# Altium PCB WiirdFlex Top Alignment.PcbDoc
Units mm, origin at the board's own origin, x right, y up, seen from the top; angles counter-clockwise.
Board outline 77.75 x 78.75 mm, 2 copper layers (Top Layer, Bottom Layer); 6 components, 1 nets, 135 pads, 0 vias.
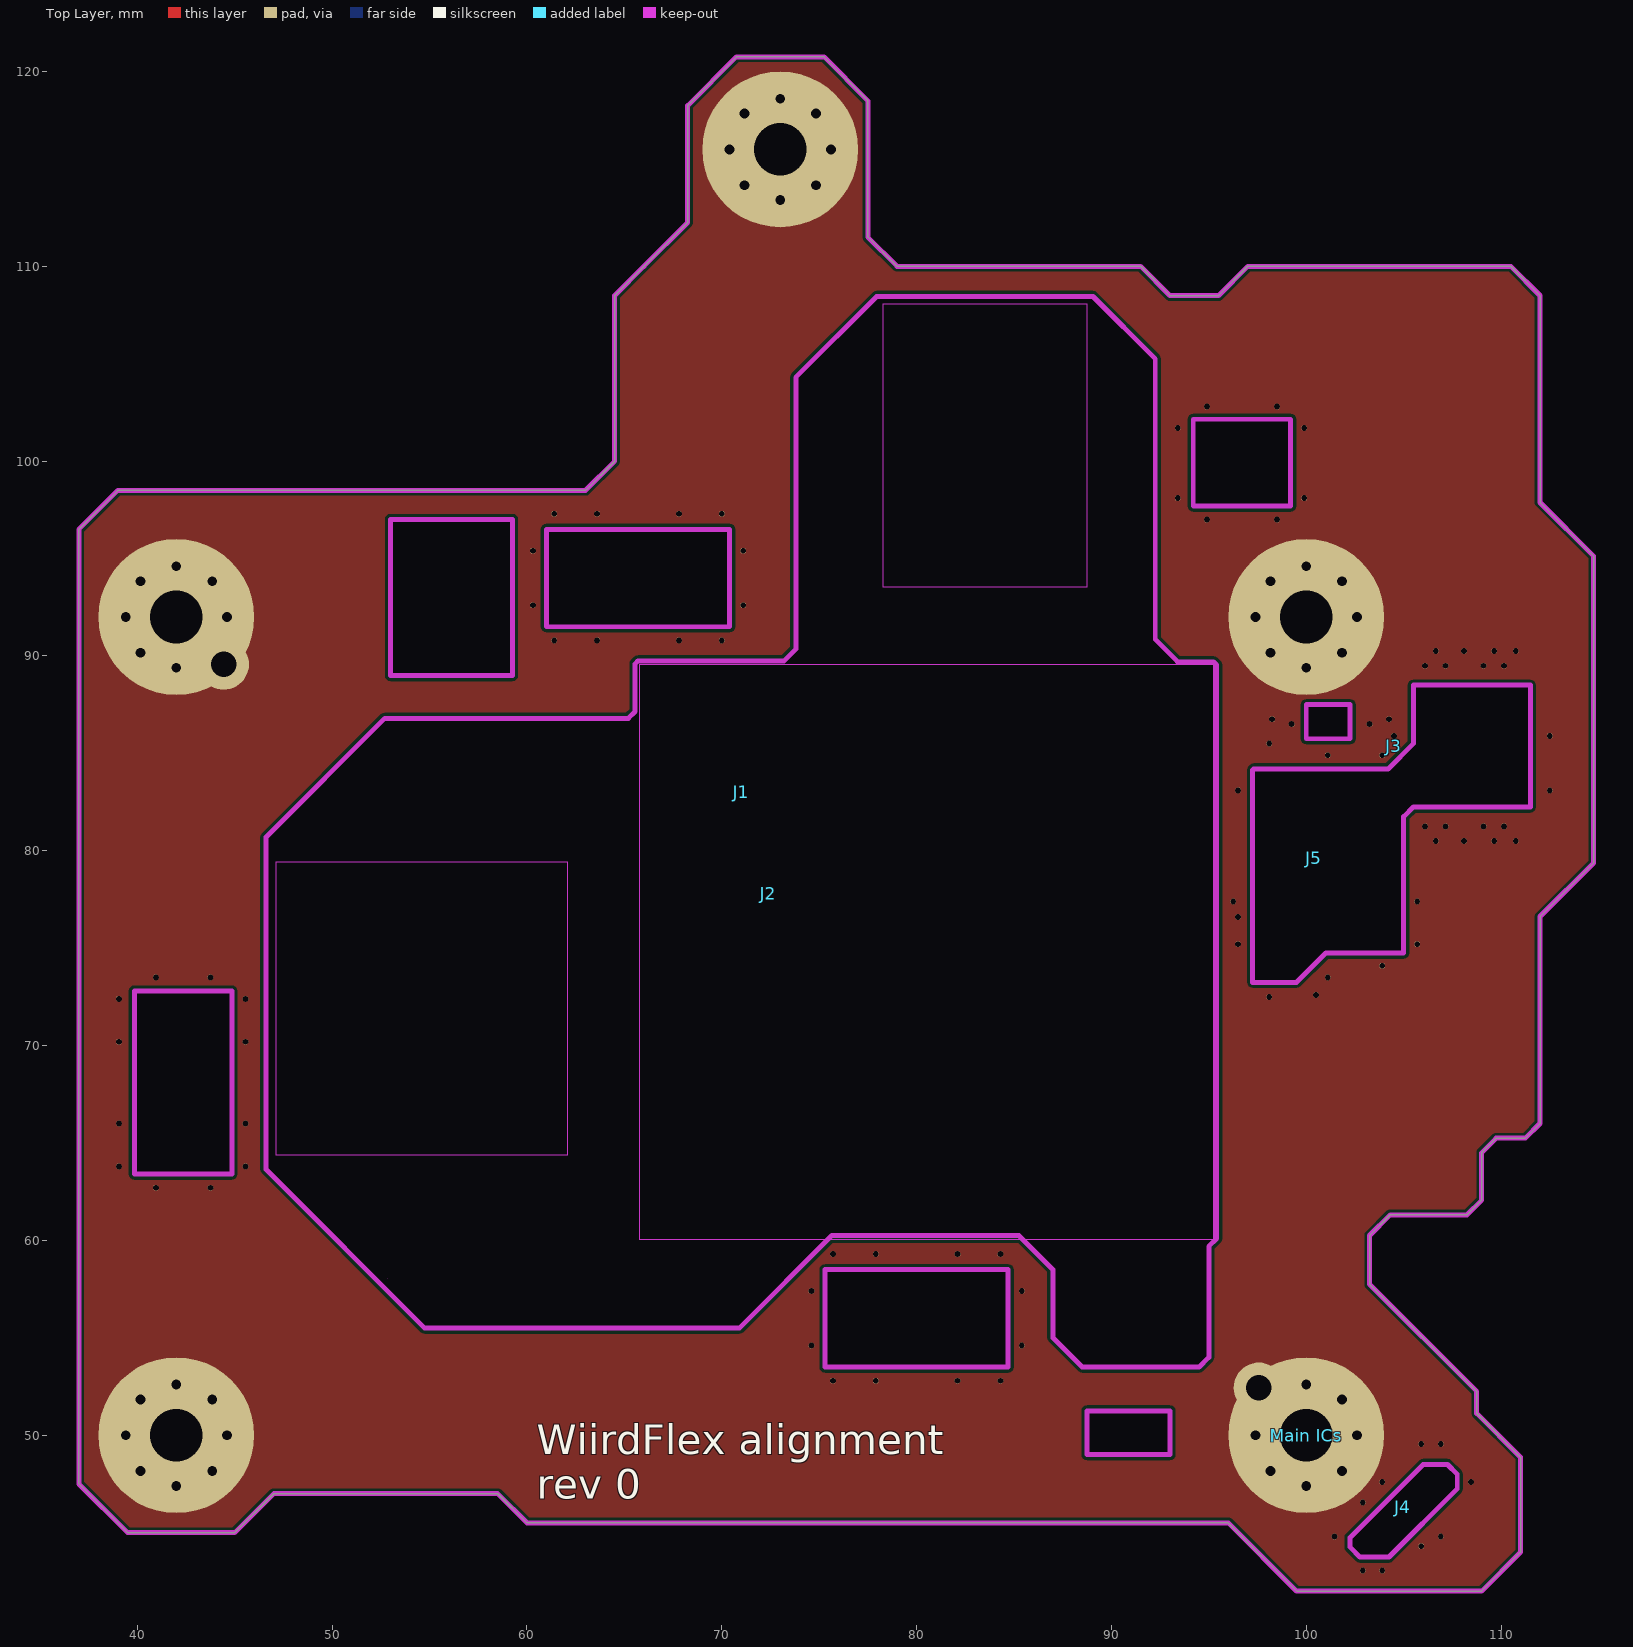
[diagram p0: Top Layer view]
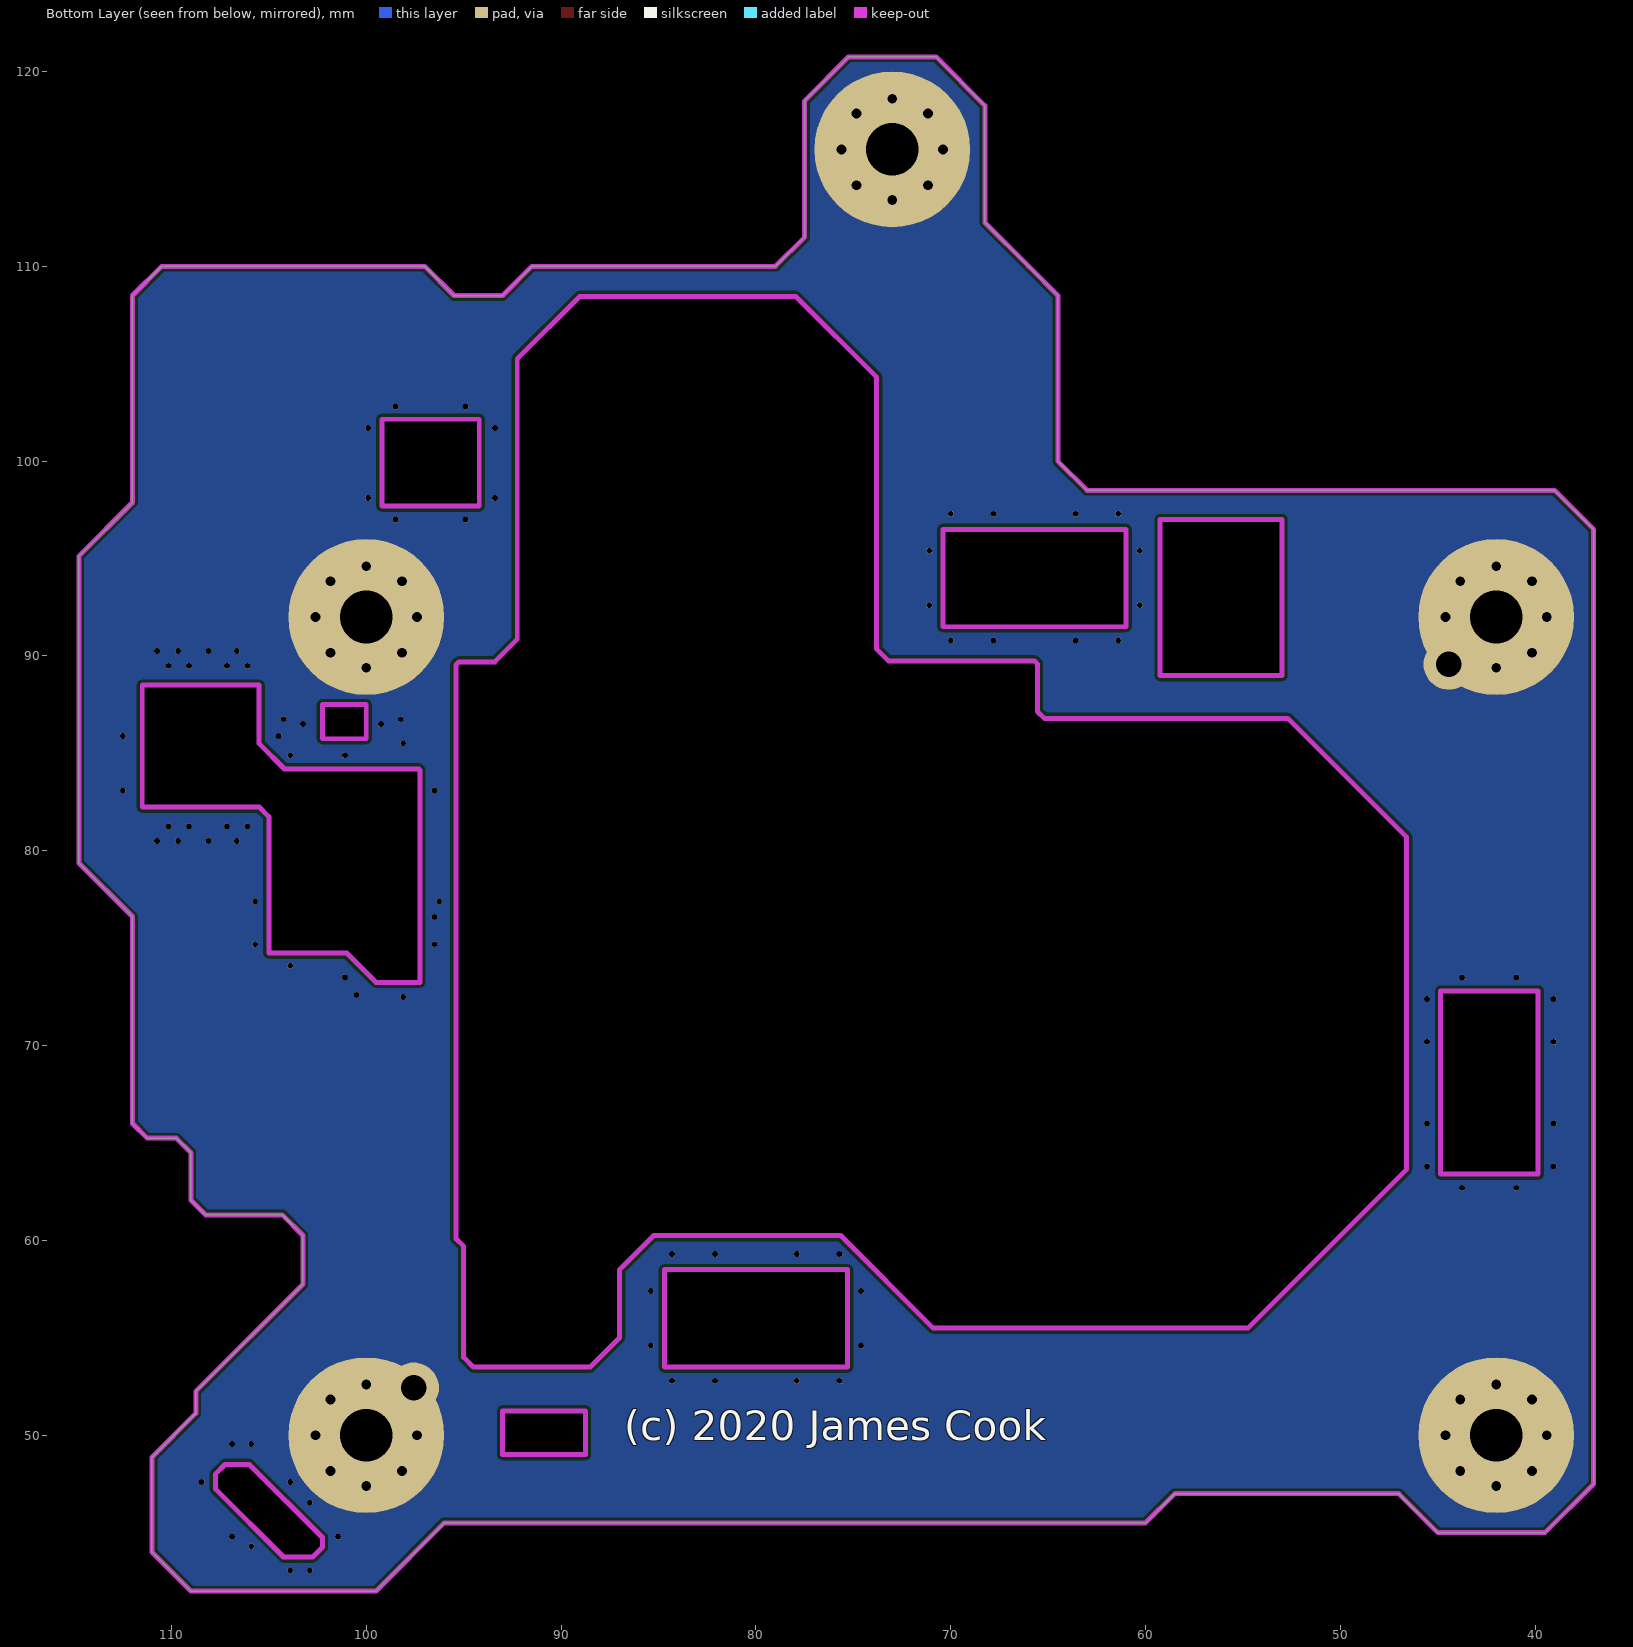
[diagram p1: Bottom Layer view, seen from below]

## Layer stack, top to bottom
Top Solder: solder mask 0.0102, Solder Resist, Dk 3.5
Top Layer: signal copper 0.0356
Dielectric 1: dielectric 0.32, FR-4, Dk 4.8
Bottom Layer: signal copper 0.0356
Bottom Solder: solder mask 0.0102, Solder Resist, Dk 3.5

## Board outline
39.5,45 45,45 47,47 58.5,47 60,45.5 96,45.5 99.5,42 109,42 111,44 111,48.875 108.75,51.125 108.75,52.25 103.25,57.75 103.25,60.25 104.312,61.312 108.25,61.312 109,62.062 109,64.5 109.75,65.25 111.25,65.25 112,66 112,76.625 114.75,79.375 114.75,95.125 112,97.875 112,108.5 110.5,110 97,110 95.5,108.5 93,108.5 91.5,110 79,110 77.5,111.5 77.5,118.5 75.25,120.75 73.25,120.75 70.75,120.75 68.25,118.25 68.25,112.25 66,110 64.5,108.5 64.5,100 63,98.5 39,98.5 37,96.5 37,47.5
cut-out: 106,48.5 107.25,48.5 107.75,48 107.75,47.25 104.25,43.75 102.75,43.75 102.25,44.25 102.25,44.75
cut-out: 102.25,87.5 102.25,85.75 100,85.75 100,87.5
cut-out: 105.5,88.5 111.5,88.5 111.5,82.25 105.5,82.25 105,81.75 105,74.8 104.95,74.75 101,74.75 99.5,73.25 97.25,73.25 97.25,84.15 97.3,84.2 104.2,84.2 105.5,85.5
cut-out: 61,96.5 70.4,96.5 70.4,91.5 61,91.5
cut-out: 94.2,102.15 94.2,97.7 99.2,97.7 99.2,102.15
cut-out: 84.7,53.5 84.7,58.5 75.3,58.5 75.3,53.5
cut-out: 39.85,72.8 44.85,72.8 44.85,63.4 39.85,63.4
cut-out: 53,97 59.25,97 59.25,89 53,89
cut-out: 94.5,53.5 95,54 95,59.7 95.4,60.1 95.4,89.54 95.24,89.7 93.4,89.7 92.25,90.85 92.25,105.25 89.05,108.45 77.95,108.45 73.8,104.3 73.8,90.35 73.2,89.75 65.7,89.75 65.55,89.6 65.55,87.15 65.2,86.8 52.7,86.8 46.6,80.7 46.6,70.7 46.6,63.65 54.75,55.5 70.9,55.5 75.65,60.25 85.25,60.25 87,58.5 87,55 88.5,53.5
cut-out: 88.75,51.25 93,51.25 93,49 88.75,49
cut-out: 52.85,58.05

## Design rules (kind name [scope] priority, off if disabled: settings)
Clearance [All] p1: gap=0.152 ignorepadtopadclearanceinfootprint=FALSE
ComponentClearance FakeComponentClearance [InComponentClass('Keepout')] p1: gap=0 collisioncheckmode=3 verticalgap=0 showdistances=FALSE // some components are fake.  copper collisions, keepouts, etc., will still apply but component clearance is meaningless for these.
ComponentClearance [All] p2: gap=0 collisioncheckmode=3 verticalgap=0 showdistances=TRUE
HoleSize [All] p1: absolutevalues=TRUE maxlimit=5 minlimit=0.025 maxpercent=80.000 minpercent=20.000
PolygonConnect [All] p1: connectstyle=Direct reliefconductorwidth=0.254 reliefentries=4 polygonreliefangle="90 Angle" airgapwidth=0.254
RoutingVias [All] p1: holewidth=0.711 width=1.27 viastyle="Through Hole" minholewidth=0.711 minwidth=1.27 maxholewidth=0.711 maxwidth=1.27
SolderMaskExpansion [All] p1: expansion=0 istentingtop=FALSE
Width [All] p1: maxlimit=0.254 minlimit=0.254 preferedwidth=0.254
28 further rules are at their usual default settings.

## Classes and differential pairs
component class Keepout: "Main ICs"

## Components (designator, comment, footprint, x,y, rotation, side; value= is the part's Value field where it differs from the comment)
J1 "RVK-01_Ground_MountingScrews" RVK-1_GND_SCREWS 100,50 r0 top locked
J2 "RVK-1_Power_Rails" RVK-1_POWER_RAILS_TOP_ALIGNMENT 100,50 r0 top locked
J3 "RVK-1_SD_Bus" RVK-1_SD_ALIGNMENT 100,50 r0 top locked
J4 "RVK-1_USB_Both" RVK-1_USB_TOP_ALIGNMENT 100,50 r0 top locked
J5 "RVK-01_Bluetooth_Data" RVK-1_BT_DATA_ALIGNMENT 100,50 r0 top locked
"Main ICs" "Keepout" RVK-1_MAIN_IC_KEEPOUT 100,50 r0 top locked

## Footprints (in the part's own frame and the unit in brackets; to place one, negate y for a bottom-side part, rotate by r counter-clockwise, add the part's x,y. Pads: shape width x height; smd on the part's side, far side on the other; paste and mask are expansions set on the pad)
RVK-1_BT_DATA_ALIGNMENT [mm]
  round 0.3 hole 0.3 unplated mask+0: 1(-0.75,36.5) 1(3.25,36.5) 2(-1.75,36.75) 2(4.25,36.75) 3(-3.5,26.6) 3(-1.9,22.5) 3(-1.9,35.5) 3(0.5,22.6)
RVK-1_GND_SCREWS [mm]
  round 1 hole 0.5: 1(-60.6,0) 1(-60.6,42) 1(-59.84,-1.84) 1(-59.84,1.84) 1(-59.84,40.16) 1(-59.84,43.84) 1(-58,-2.6) 1(-58,2.6) 1(-58,39.4) 1(-58,44.6) 1(-56.16,-1.84) 1(-56.16,1.84) 1(-56.16,43.84) 1(-55.4,0) 1(-55.4,42) 1(-29.6,66) 1(-28.84,64.16) 1(-28.84,67.84) 1(-27,63.4) 1(-27,68.6) 1(-25.16,64.16) 1(-25.16,67.84) 1(-24.4,66) 1(-2.6,0) 1(-2.6,42) 1(-1.84,-1.84) 1(-1.84,40.16) 1(-1.84,43.84) 1(0,-2.6) 1(0,2.6) 1(0,39.4) 1(0,44.6) 1(1.84,-1.84) 1(1.84,1.84) 1(1.84,40.16) 1(1.84,43.84) 1(2.6,0) 1(2.6,42)
  round 8 hole 2.7: 1(-58,0) 1(-58,42) 1(-27,66) 1(0,0) 1(0,42)
  round 2.6 hole 1.3: 1(-55.568,39.568) 1(-2.432,2.432)
RVK-1_MAIN_IC_KEEPOUT [mm]
  Top Layer keep-out region: -52.9,14.4 -37.9,14.4 -37.9,29.4 -52.9,29.4
  Top Layer keep-out region: -34.25,10.05 -4.75,10.05 -4.75,39.55 -34.25,39.55
  Top Layer keep-out region: -21.75,43.55 -11.25,43.55 -11.25,58.05 -21.75,58.05
RVK-1_POWER_RAILS_TOP_ALIGNMENT [mm] "alignment test footprint for top side power rail connection points"
  round 0.3 hole 0.3 unplated: 1(-60.95,13.8) 1(-60.95,16) 1(-59.05,12.7) 1(-59.05,23.5) 1(-56.25,12.7) 1(-56.25,23.5) 1(-54.45,13.8) 1(-54.45,16) 1(-39.7,42.6) 1(-39.7,45.4) 1(-38.6,40.8) 1(-38.6,47.3) 1(-36.4,40.8) 1(-36.4,47.3) 1(-28.9,42.6) 1(-28.9,45.4) 1(-25.4,4.6) 1(-25.4,7.4) 1(-24.3,2.8) 1(-24.3,9.3) 1(-22.1,2.8) 1(-22.1,9.3) 1(-14.6,4.6) 1(-14.6,7.4) 1(-3.75,27.4) 1(-3.5,25.2) 1(1.1,34.9) 1(3.9,24.1) 1(3.9,34.9) 1(5.7,25.2) 1(5.7,27.4) 2(-32.2,40.8) 2(-32.2,47.3) 2(-30,40.8) 2(-30,47.3) 3(-60.95,20.2) 3(-60.95,22.4) 3(-54.45,20.2) 3(-54.45,22.4) 4(-17.9,2.8) 4(-17.9,9.3) 4(-15.7,2.8) 4(-15.7,9.3) 4(-6.6,48.1) 4(-6.6,51.7) 4(-5.1,47) 4(-5.1,52.8) 4(-1.5,47) 4(-1.5,52.8) 4(-0.1,48.1) 4(-0.1,51.7) 5(1.1,23.5)
  Keep-Out Layer lines w0.254: -60.15,13.4 -60.15,22.8 -55.15,22.8 -55.15,13.4 -60.15,13.4 ; -39,41.5 -39,46.5 -29.6,46.5 -29.6,41.5 -39,41.5 ; -24.7,3.5 -24.7,8.5 -15.3,8.5 -15.3,3.5 -24.7,3.5 ; -5.8,47.7 -5.8,52.15 -0.8,52.15 -0.8,47.7 -5.8,47.7
RVK-1_SD_ALIGNMENT [mm] "alignment check footprint for SD target pads"
  round 0.3 hole 0.3 unplated: 1(-3.5,33.1) 1(6.1,31.25) 1(6.1,39.5) 1(12.5,33.1) 2(6.65,30.5) 2(6.65,40.25) 3(7.15,31.25) 3(7.15,39.5) 4(4.5,35.9) 4(8.1,30.5) 4(8.1,40.25) 4(12.5,35.9) 5(9.1,31.25) 5(9.1,39.5) 6(9.65,30.5) 6(9.65,40.25) 7(10.15,31.25) 7(10.15,39.5) 8(10.75,30.5) 8(10.75,40.25)
RVK-1_USB_TOP_ALIGNMENT [mm] "alignment test footprint for USB vias"
  round 0.3 hole 0.3 unplated: 1(1.45,-5.2) 1(3.9,-6.95) 2(2.9,-6.95) 2(2.9,-3.45) 3(3.9,-2.4) 3(5.9,-5.7) 3(5.9,-0.45) 3(8.45,-2.4) 4(6.9,-5.2) 4(6.9,-0.45)

## Part data
J2: "Connection points for Wii power rails"
"Main ICs": ClassName=Keepout

## Nets (pads, with @x,y where several pads share a name; then routed paths per layer and width w, separated by ;. In a path a pad name is that pad's centre, name@x,y a point inside that pad or via, vN(x,y) a via of type N, cw(c..) or ccw(c..) an arc to the next point about the centre after c; other vN are vias at no path point)
GND: J1.1 J2.1 J2.2 J2.3 J2.4 J2.5 J3.1 J3.2 J3.3 J3.4 J3.5 J3.6 J3.7 J3.8 J4.1 J4.2 J4.3 J4.4 J5.1 J5.2 J5.3

## Polygon pours and split planes (outlines as drawn)
GND on Bottom Layer "GND_L02_P001" (solid, remove dead copper, pour order 1): 33.75,126 115.75,126 116.25,125.5 116.25,38.75 33.75,38.75
GND on Top Layer "GND_L01_P000" (solid, remove dead copper, pour order 0): 32,125.5 118,125.5 118,36 116.5,34.5 115,36 31.75,36

## Keep-outs
Keep-Out Layer:
  lines w0.254: 37,47.5 37,96.5 39,98.5 63,98.5 64.5,100 64.5,108.5 66,110 68.25,112.25 68.25,118.25 70.75,120.75 73.25,120.75 75.25,120.75 77.5,118.5 77.5,111.5 79,110 91.5,110 93,108.5 95.5,108.5 97,110 110.5,110 112,108.5 112,97.875 114.75,95.125 114.75,79.375 112,76.625 112,66 111.25,65.25 109.75,65.25 109,64.5 109,62.062 108.25,61.312 105.312,61.312 104.312,61.312 103.25,60.25 103.25,57.75 108.75,52.25 108.75,51.125 111,48.875 111,44 109,42 99.5,42 96,45.5 60,45.5 58.5,47 47,47 45,45 39.5,45 37,47.5 ; 46.6,63.65 54.75,55.5 70.9,55.5 75.65,60.25 85.25,60.25 87,58.5 87,55 88.5,53.5 94.5,53.5 95,54 95,59.7 95.4,60.1 95.4,89.54 95.24,89.7 93.4,89.7 92.25,90.85 92.25,105.25 89.05,108.45 77.95,108.45 73.8,104.3 73.8,90.35 73.2,89.75 65.7,89.75 65.55,89.6 65.55,87.15 65.2,86.8 52.7,86.8 46.6,80.7 46.6,75.05 46.6,70.7 46.6,63.65 ; 53,89 59.25,89 59.25,97 53,97 53,89 ; 88.75,49 93,49 93,51.25 88.75,51.25 88.75,49 ; 97.25,73.25 99.5,73.25 101,74.75 105,74.75 105,81.75 105.5,82.25 111.5,82.25 111.5,88.5 105.5,88.5 105.5,85.5 104.2,84.2 97.3,84.2 97.25,84.15 97.25,73.25 ; 100,85.75 100,87.5 102.25,87.5 102.25,85.75 100,85.75 ; 102.25,44.25 102.25,44.75 106,48.5 107.25,48.5 107.75,48 107.75,47.25 104.25,43.75 102.75,43.75 102.25,44.25

## Silkscreen, mask and mechanical layers (free items; w line width, h text height)
Top Overlay:
  text "WiirdFlex alignment / rev 0" at 60.5,46.75 h1.52
Bottom Overlay:
  text "(c) 2020 James Cook" at 86.746,49.754 h1.52